# Altium PCB PCB2.PcbDoc
Units mil, origin at the board's own origin, x right, y up, seen from the top; angles counter-clockwise.
Board outline 6000 x 4000 mil, 2 copper layers (Top Layer, Bottom Layer); 48 components, 29 nets, 141 pads, 28 vias.
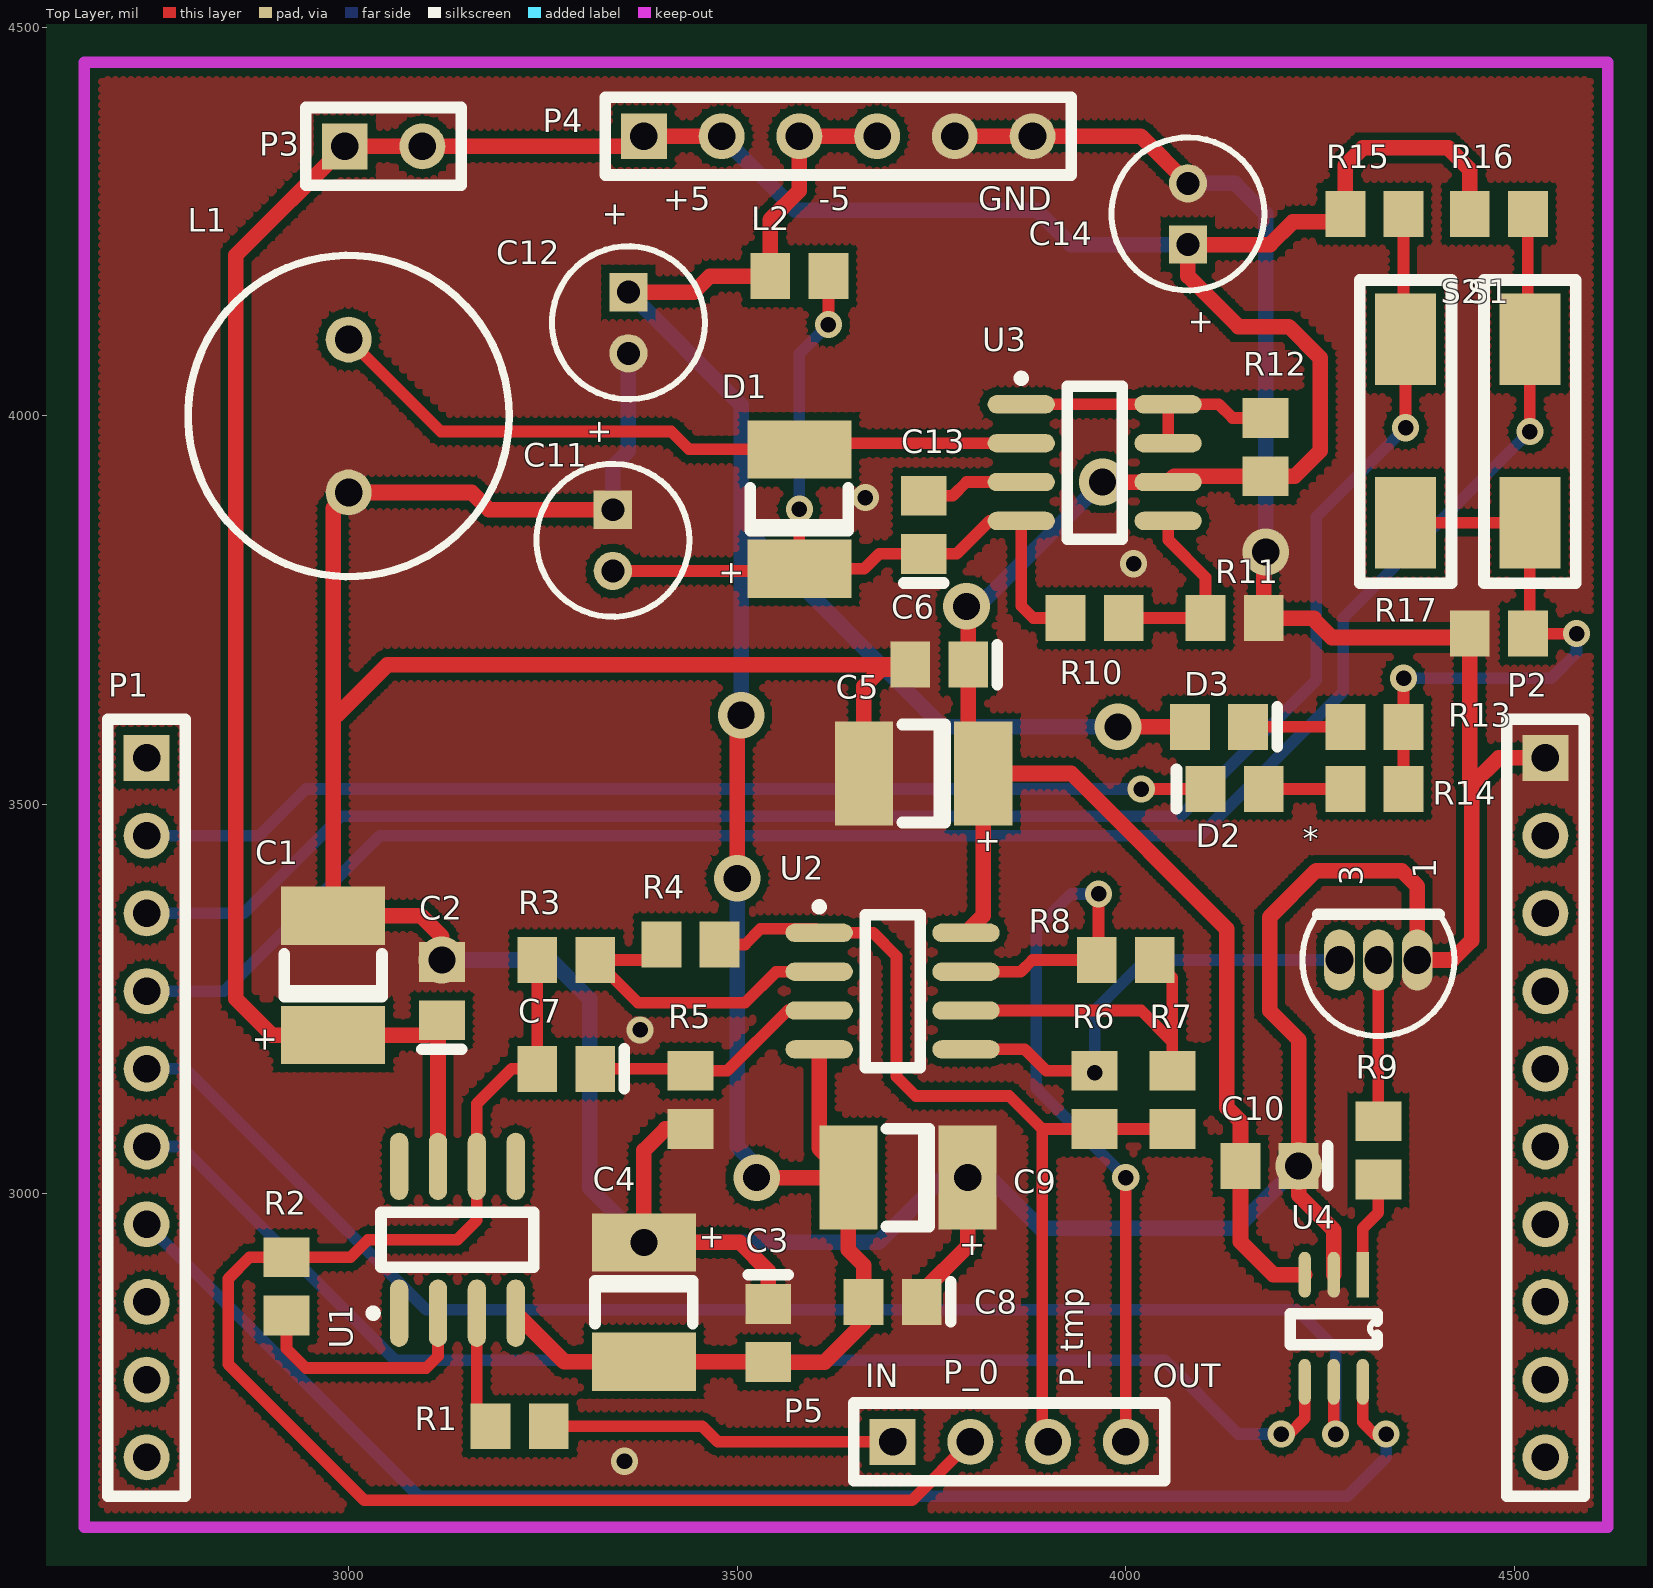
[diagram p0: Top Layer view]
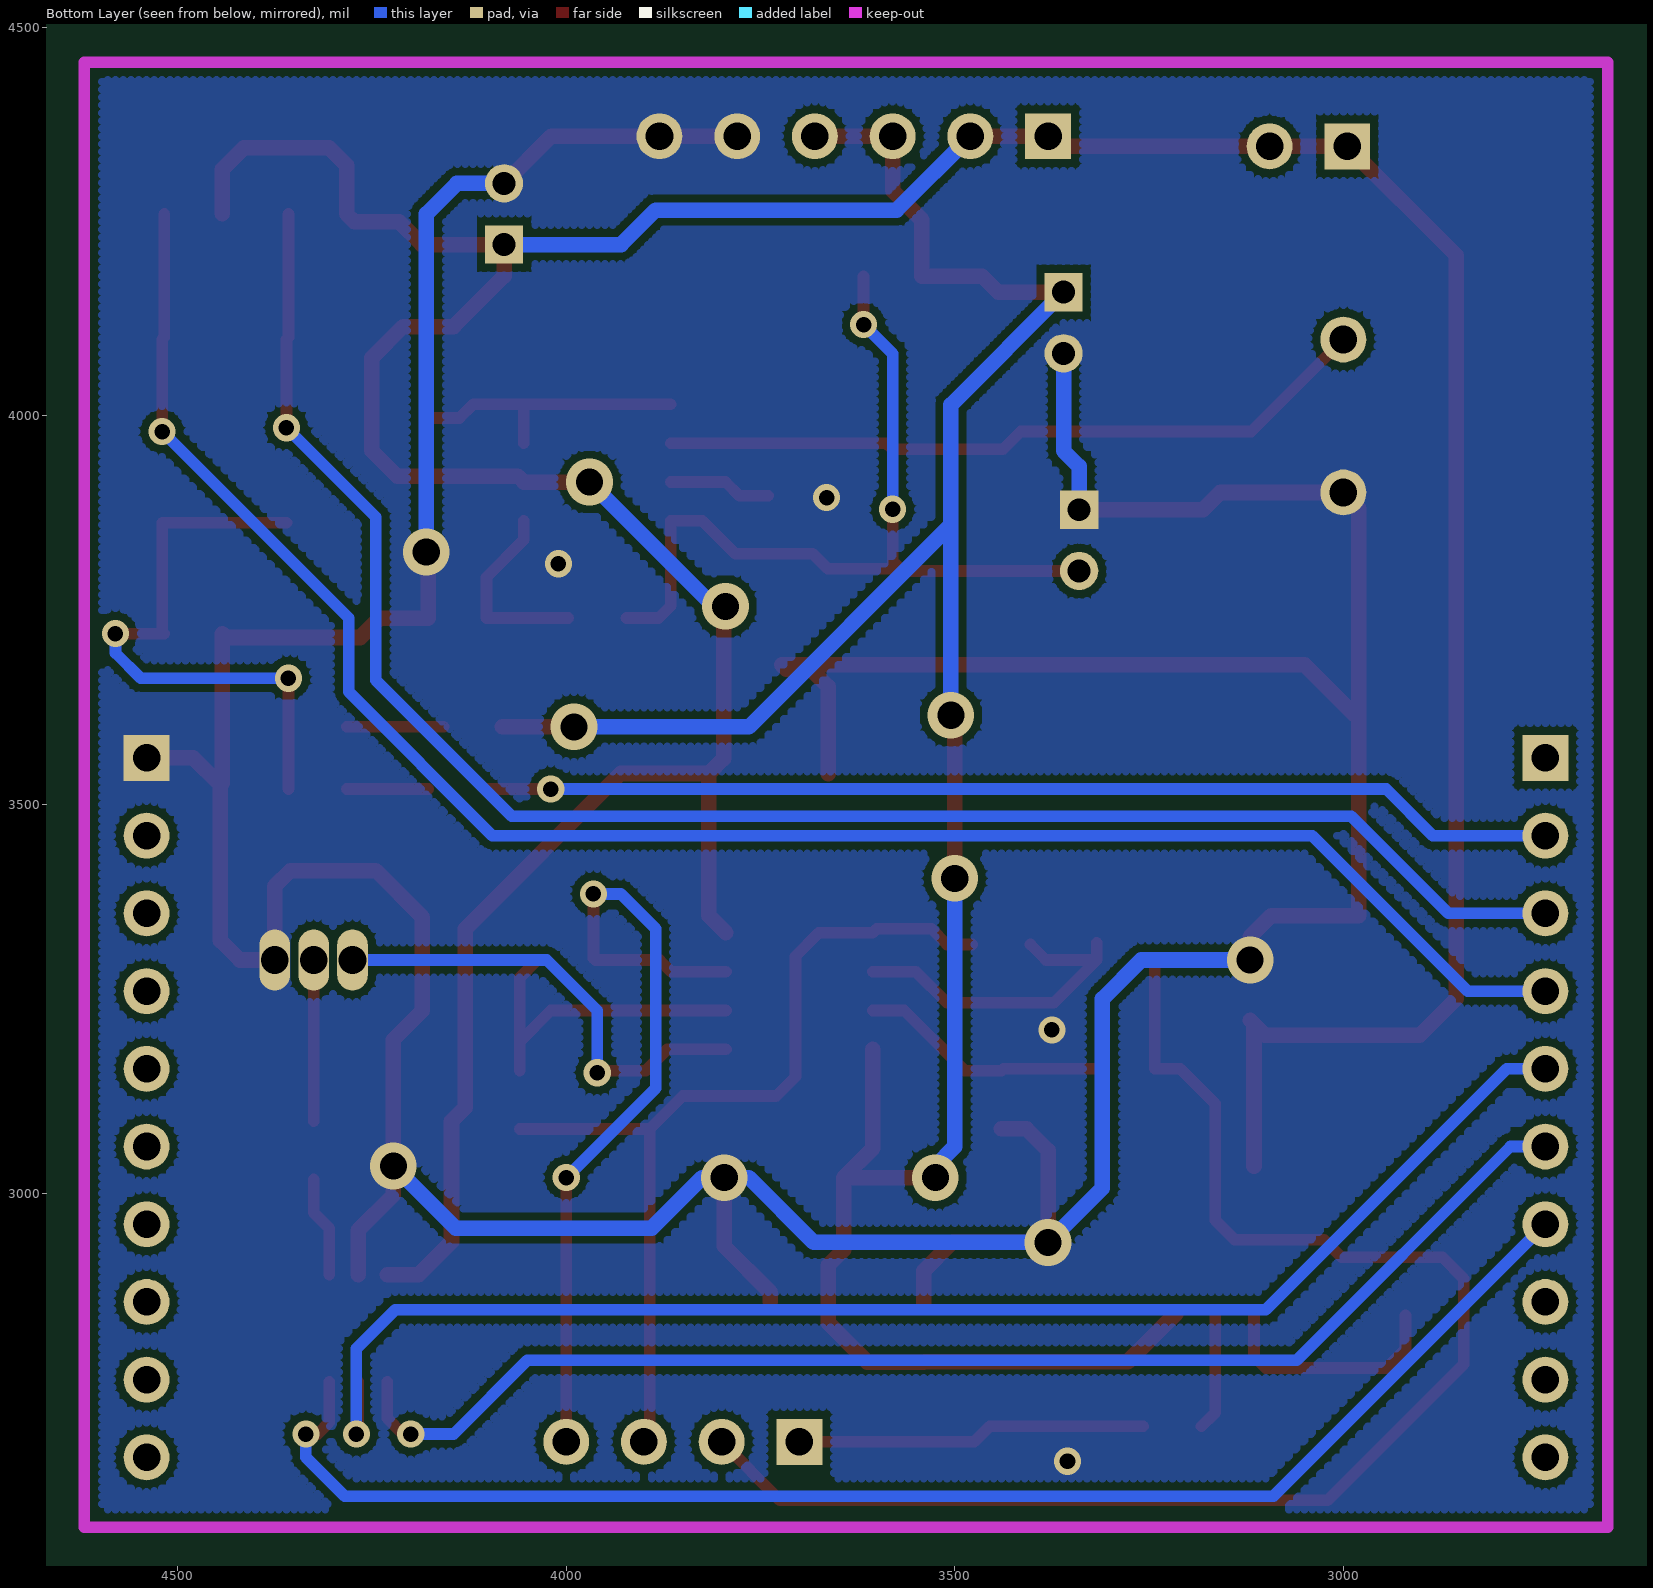
[diagram p1: Bottom Layer view, seen from below]

## Layer stack, top to bottom
Top Layer: signal copper 1.4
Dielectric: dielectric 12.6, FR-4, Dk 4.8
Bottom Layer: signal copper 1.4

## Board outline
1000,1000 7000,1000 7000,5000 1000,5000

## Design rules (kind name [scope] priority, off if disabled: settings)
Clearance [All] p1: gap=10
PolygonConnect [All] p1: connectstyle=Direct reliefconductorwidth=10 reliefentries=4 polygonreliefangle="90 Angle"
RoutingVias [All] p1: holewidth=28 width=50 viastyle="Through Hole" minholewidth=28 minwidth=50 maxholewidth=28 maxwidth=50
SilkscreenOverComponentPads [All] p1: minsilkscreentomaskgap=10
SolderMaskExpansion [All] p1: expansion=4
Width [All] p1: maxlimit=50 minlimit=10 preferedwidth=20
27 further rules are at their usual default settings.

## Components (designator, comment, footprint, x,y, rotation, side; value= is the part's Value field where it differs from the comment)
* "KV1360" T092-3 3800,3300 r90 top
C1 "Cap2" 1812 2980,3280 r90 top
C2 "Cap" C0805 3120,3260 r90 top
C3 "Cap" C0805 3540,2820 r270 top
C4 "Cap2" 1812 3380,2860 r270 top
C5 "Cap2" 1812 3740,3540 r180 top
C6 "Cap" C0805 3760,3680 r180 top
C7 "Cap" C0805 3280,3160 r180 top
C8 "Cap" C0805 3700,2860 r180 top
C9 "Cap2" 1812 3720,3020 r180 top
C10 "Cap" C0805 4185,3035 r180 top
C11 "Cap2" CAPPR2-5x6.8 3340,3840 r270 top
C12 "Cap2" CAPPR2-5x6.8 3360,4120 r270 top
C13 "Cap" C0805 3740,3860 r90 top
C14 "Cap2" CAPPR2-5x6.8 4080,4260 r90 top
D1 "IN5819" 1812 3580,3880 r90 top
D2 "LED0" C0805 4140,3520 r0 top
D3 "LED0" C0805 4120,3600 r180 top
L1 "Inductor" RB5-10.5 3000,4000 r90 top
L2 "Inductor" 2012[0805] 3580,4180 r180 top
P1 "Header 10" HDR1X10 2740,3560 r270 top locked
P2 "Header 10" HDR1X10 4540,3560 r270 top locked
P3 "Header 2" HDR1X2 2995,4347 r0 top locked
P4 "Header 6" HDR1X6 3380,4360 r0 top
P5 "Header 4" HDR1X4 3700,2680 r0 top
R1 "Res2" 2012[0805] 3220,2700 r180 top
R2 "Res2" 2012[0805] 2920,2880 r90 top
R3 "Res2" 2012[0805] 3280,3300 r0 top
R4 "Res2" 2012[0805] 3440,3320 r0 top
R5 "Res2" 2012[0805] 3440,3120 r90 top
R6 "Res2" 2012[0805] 3960,3120 r90 top
R7 "Res2" 2012[0805] 4060,3120 r90 top
R8 "Res2" 2012[0805] 4000,3300 r180 top
R9 "Res2" 2012[0805] 4325,3055 r90 top
R10 "Res2" 2012[0805] 3960,3740 r0 top
R11 "Res2" 2012[0805] 4140,3740 r180 top
R12 "Res2" 2012[0805] 4180,3960 r270 top
R13 "Res2" 2012[0805] 4320,3600 r180 top
R14 "Res2" 2012[0805] 4320,3520 r180 top
R15 "Res2" 2012[0805] 4320,4260 r0 top
R16 "Res2" 2012[0805] 4480,4260 r180 top
R17 "Res2" 2012[0805] 4480,3720 r0 top
S1 "KEY_1" SW 4360,4020 r270 top
S2 "KEY_1" SW 4520,4020 r270 top
U1 "opa890" SO-8_N 3140,2940 r90 top
U2 "opa2134" SO-8_N 3700,3260 r0 top
U3 "MC34063" SO-8_N 3960,3940 r0 top
U4 "dac7512" SOT23-6 4305,2895 r270 top

## Footprints (in the part's own frame and the unit in brackets; to place one, negate y for a bottom-side part, rotate by r counter-clockwise, add the part's x,y. Pads: shape width x height; smd on the part's side, far side on the other; paste and mask are expansions set on the pad)
1812 [mm]
  rect 1.9x3.4 smd: 1(-1.944,0) 2(1.956,0)
  silkscreen extent -0.69,-1.6 0.71,1.6
2012[0805] [mm]
  rect 1.3x1.5 smd: 1(-0.95,0) 2(0.95,0)
C0805 [mm]
  rect 1.3x1.5 smd: 1(-0.95,0) 2(0.95,0)
  silkscreen extent -1.9,-0.65 -1.9,0.65
CAPPR2-5x6.8 [mm] "Capacitor, Electrolytic, Radial; Body 5 x 6.8 mm (Dia.xH typ); Pin Spacing 2 mm (typ)"
  rect 1.25x1.25 hole 0.75: 1(-1,0)
  round 1.25 hole 0.75: 2(1,0)
  silkscreen extent -2.5,-2.5 2.5,2.5
HDR1X2 [mm] "Connector; Header; 2 Position"
  rect 1.5x1.5 hole 0.9: 1(0,0)
  round 1.5 hole 0.9: 2(2.54,0)
  silkscreen extent -1.27,-1.27 3.81,1.27
HDR1X4 [mm] "Connector; Header; 4 Position"
  rect 1.5x1.5 hole 0.9: 1(0,0)
  round 1.5 hole 0.9: 2(2.54,0) 3(5.08,0) 4(7.62,0)
  silkscreen extent -1.27,-1.27 8.89,1.27
HDR1X6 [mm] "Connector; Header; 6 Position"
  rect 1.5x1.5 hole 0.9: 1(0,0)
  round 1.5 hole 0.9: 2(2.54,0) 3(5.08,0) 4(7.62,0) 5(10.16,0) 6(12.7,0)
  silkscreen extent -1.27,-1.27 13.97,1.27
HDR1X10 [mm] "Connector; Header; 10 Position"
  rect 1.5x1.5 hole 0.9: 1(0,0)
  round 1.5 hole 0.9: 2(2.54,0) 3(5.08,0) 4(7.62,0) 5(10.16,0) 6(12.7,0) 7(15.24,0) 8(17.78,0) 9(20.32,0) 10(22.86,0)
  silkscreen extent -1.27,-1.27 24.13,1.27
RB5-10.5 [mm] "Motor, General Kind; 2 Leads"
  round 1.5 hole 0.9: 1(-2.5,0) 2(2.5,0)
  silkscreen extent -5.25,-5.25 5.25,5.25
SO-8_N [mm]
  oval 2.2x0.6 smd: 1(-2.4,1.905) 2(-2.4,0.635) 3(-2.4,-0.635) 4(-2.4,-1.905) 5(2.4,-1.905) 6(2.4,-0.635) 7(2.4,0.635) 8(2.4,1.905)
  silkscreen extent -2.52,-2.5 0.9,2.88
SOT23-6 [mm]
  rect 1.5x0.4 smd: 1(0,0)
  oval 1.5x0.4 smd: 2(0,-0.95) 3(0,-1.9) 4(3.5,-1.9) 5(3.5,-0.95) 6(3.5,0)
  silkscreen extent 1.27,-2.38 2.29,0.48
SW [mm]
  rect 3x2 smd: 1(-2,0) 2(4,0)
  silkscreen extent -3.94,-1.5 5.97,1.5
T092-3 [mm]
  oval 2x1 hole 0.9: 1(0,-14.605) 2(0,-13.335) 3(0,-12.065)
  silkscreen extent -2.48,-15.82 1.5,-10.85

## Part data
C1 C2 C3 C4 C5 C6 C7 C8 C9 C10 C11 C12 C13 C14: "Capacitor"
D1: library part "Diode 11DQ03", "Schottky Rectifier"
D2 D3: "Typical INFRARED GaAs LED"
P1 P2: "Header, 10-Pin"
P3: "Header, 2-Pin"
P4: "Header, 6-Pin"
P5: "Header, 4-Pin"
R1 R2 R3 R4 R5 R6 R7 R8 R9 R10 R11 R12 R13 R14 R15 R16 R17: "Resistor"
S1 S2: library part SW-PB, "Switch"

## Via types
v1: diameter 35, hole 20, Top Layer to Bottom Layer, 17 vias
v2: diameter 60, hole 35, Top Layer to Bottom Layer, 11 vias

## Nets (pads, with @x,y where several pads share a name; then routed paths per layer and width w, separated by ;. In a path a pad name is that pad's centre, name@x,y a point inside that pad or via, vN(x,y) a via of type N, cw(c..) or ccw(c..) an arc to the next point about the centre after c; other vN are vias at no path point)
-5: C3.2 C4.2 C8.2 C9.2 C12.1 D3.2 L2.2 P4.3 P4.4 U1.4 U2.4 | length 3372.2
  Top Layer w20: U1.4 3277.51,2783 C4.2 3539.6,2783 C3.2 3612.6,2782.6 3662.6,2832.6 C8.2 3662.6,2907.4 3643,2927 C9.2 ; C12.1 3444.37,4159.37 3465,4180 L2.2 3542.6,4252.6 3580,4290 P4.3 P4.4 ; v2@3500,3410 3500,3610 v2(3505,3615) ; v2(3525,3020) C9.2 ; U2.4 3605.51,3057.49 C9.2 ; v2(3990,3600) D3.2
  Bottom Layer w20: C12.1 3505,4014.37 3505,3860 ; v2@3500,3410 3500,3060 3525,3035 v2(3525,3020) ; v2(3505,3615) 3505,3860 ; v2(3990,3600) 3765,3600 3505,3860
  other v2: 3500,3405
DA_CLK: P1.5 U4.5 | length 1857.3
  Top Layer w15: U4.5 4267.6,2692.4 v1(4270,2690)
  Bottom Layer w15: P1.5 2790,3160 3100,2850 4220,2850 4270,2800 v1(4270,2690)
DA_DAT: P1.6 U4.4 | length 1698.8
  Top Layer w15: v1(4200,2690) 4210,2690 4230.2,2710.2 U4.4
  Bottom Layer w15: P1.6 2785,3060 3060,2785 4050,2785 4145,2690 v1(4200,2690)
DA_SYNC: P1.7 U4.6 | length 1879.1
  Top Layer w15: U4.6 4305,2705 4320,2690 v1(4335,2690)
  Bottom Layer w15: P1.7 3090,2610 4285,2610 4335,2660 v1(4335,2690)
FINAL_OUT: P5.4 R8.2 U2.7 | length 1073.7
  Top Layer w15: U2.7 3865,3285 3880,3300 R8.2 3965,3302.4 v1(3965,3385) ; v1@3995,3015 v1(4000,3020) P5.4
  Bottom Layer w15: v1(3965,3385) 3930,3385 3885,3340 3885,3135 v1(4000,3020)
GND: *.1 C1.2 C2.2 C3.1 C4.1 C5.2 C6.2 C8.1 C9.1 C10.1 C11.1 C12.2 C14.2 L1.1 P2.1 P4.5 P4.6 R5.1 R11.1 R17.1 U4.2 | length 6968.1
  Top Layer w20: 2985,3615 3050,3680 C6.2 3716.6,3674 3685,3674 3663,3652 C5.2 ; C2.2 3120,3330 3093,3357 C1.2 2980,3881.57 L1.1 3158.43,3901.57 3180.63,3879.37 C11.1 ; R5.1 3407.6,3082.6 3380,3055 v2(3380,2936.54) 3503.46,2936.54 3540,2900 C3.1 ; C8.1 3737.4,2872.4 3796.54,2931.54 v2(3796.54,3020) ; P4.5 P4.6 4019.37,4360 C14.2 ; v2@4177.4,3817.4 R11.1 4240,3740 ; C10.1@4215,3042.4 v2(4222.4,3035) ; 4242.6,3740 4240,3740 ; U4.2 4267.6,2952.4 4222.4,2997.6 v2(4222.4,3035) ; P2.1 4480,3560 4445,3525 ; v2(4222.4,3035) 4222.4,3197.6 4185,3235 4185,3355 4245,3415 4355,3415 4375,3395 *.1 4420,3300 4445,3325 4445,3525 ; 4240,3740 4265,3715 4437.6,3715 R17.1 4442.6,3527.4 4445,3525
  Bottom Layer w20: v2(3120,3300) 3260,3300 3310,3250 3310,3006.54 v2(3380,2936.54) 3681.54,2936.54 3765,3020 v2(3796.54,3020) 3825,3020 3890,2955 4142.4,2955 v2(4222.4,3035) ; C11.1 3340,3935 3360,3955 C12.2 ; C14.2 4140.63,4299.37 4180,4260 v2(4180,3825)
  other v1: 3355,2655 3375,3210 4010,3810 3665,3895
KEY1: P1.3 R15.2 S1.1 | length 2278
  Top Layer w15: R15.2 4357.4,4101.34 S1.1 v1(4360,3985)
  Bottom Layer w15: P1.3 2865,3360 2990,3485 4070,3485 4245,3660 4245,3870 v1(4360,3985)
KEY2: P1.4 R16.1 S2.1 | length 2415
  Top Layer w15: R16.1 4517.4,4101.34 S2.1 v1(4520,3980)
  Bottom Layer w15: P1.4 2840,3260 3040,3460 4095,3460 4280,3645 4280,3740 v1(4520,3980)
LED: D2.1 P1.2 | length 1387.5
  Top Layer w15: v1(4020,3520) D2.1
  Bottom Layer w15: P1.2 2885,3460 2945,3520 v1(4020,3520)
Net*_2: *.2 R9.2 | length 207.6
  Top Layer w15: R9.2 *.2
Net*_3: *.3 R6.2 U2.5 | length 598.9
  Top Layer w15: U2.5 3870,3185 3897.6,3157.4 R6.2
  Bottom Layer w15: v1(3960,3155) 3960,3235 4025,3300 *.3
NetC7_1: C7.1 R5.2 U2.3 | length 321.3
  Top Layer w15: C7.1 3437.4,3160 R5.2 3487.4,3157.4 3565,3235 U2.3
NetC11_2: C11.2 C13.1 D1.1 L2.1 R10.1 U3.4 | length 1124.3
  Top Layer w15: C11.2 3577.17,3800.63 D1.1 ; D1.1@3575,3808.46 D1.1 ; v1(3580,3880) D1.1 ; v1(3617.4,4117.6) L2.1 ; R10.1 3881.02,3740 3865.51,3755.51 U3.4 3825,3865 3782.6,3822.6 C13.1 3682.6,3822.6 3663.46,3803.46 D1.1
  Bottom Layer w15: v1(3580,3880) 3580,4080.2 v1(3617.4,4117.6)
NetC13_2: C13.2 U3.3 | length 132.8
  Top Layer w15: C13.2 3777.4,3897.4 3795,3915 U3.3
NetD1_2: D1.2 L1.2 U3.2 | length 927.4
  Top Layer w15: L1.2 3118.43,3980 3415,3980 3438,3957 D1.2 3588,3965 U3.2
NetD2_2: D2.2 R14.2 | length 105.2
  Top Layer w15: D2.2 R14.2
NetD3_1: D3.1 R13.2 | length 125.2
  Top Layer w15: D3.1 R13.2
NetR1_2: R1.2 U1.3 | length 152.8
  Top Layer w15: U1.3 3165,2717.6 R1.2
NetR2_1: R2.1 U1.2 | length 309.7
  Top Layer w15: R2.1 2920,2800 2945,2775 3100,2775 3115,2790 U1.2
NetR3_2: R3.2 R4.1 U2.2 | length 443.3
  Top Layer w15: R3.2@3317.4,3322.4 R3.2 ; R4.1 3382.6,3300 R3.2 ; U2.2 3550,3285 3510,3245 3372.4,3245 R3.2
NetR7_2: R7.2 R8.1 U2.6 | length 434
  Top Layer w15: U2.6 4020,3235 4060,3195 ; R8.1 4060,3277.4 4060,3195 ; R7.2 4060,3195
NetR9_1: R9.1 U4.1 | length 130.9
  Top Layer w15: U4.1 4305,2955 4325,2975 R9.1
NetR10_2: R10.2 R11.2 U3.5 | length 250.1
  Top Layer w15: R10.2 R11.2 4102.6,3792.4 4054.49,3840.51 U3.5
NetR12_1: R12.1 U3.1 U3.7 U3.8 | length 371.8
  Top Layer w15: U3.1 U3.8 ; U3.7 U3.8 ; R12.1 4137.4,3997.4 4119.8,4015 U3.8
NetR13_1: R13.1 R14.1 R17.2 S1.2 S2.2 | length 769.8
  Top Layer w15: R14.1 R13.1 v1(4357.4,3662.6) ; S1.2 S2.2 4520,3722.6 R17.2 v1(4580,3720)
  Bottom Layer w15: v1(4357.4,3662.6) 4547.6,3662.6 4580,3695 v1(4580,3720)
OP2+: C1.1 C2.1 C5.1 C6.1 C10.2 C14.1 P3.1 P3.2 P4.1 P4.2 R12.2 R15.1 R16.2 U1.7 U2.8 U3.6 U4.3 | length 5547.9
  Top Layer w20: U1.7 C2.1@3115,3217.6 ; C2.1 C2.1@3115,3217.6 ; P4.2 P4.1 3367,4347 P3.2 P3.1 2855,4207 2855,3250 2901.54,3203.46 C1.1 3100.86,3203.46 C2.1@3115,3217.6 ; U2.8 3816.54,3357.06 C5.1 ; v2@3797.4,3742.4 C6.1 3797.4,3559.14 C5.1 ; v2@3965,3920 v2(3970,3915) U3.6 4062.09,3922.6 R12.2 4217.6,3922.6 4250,3955 4250,4075 4210,4115 4145,4115 4080,4180 C14.1 4185.63,4220.63 4215,4250 4272.6,4250 R15.1 4282.6,4322.6 4305,4345 4415,4345 4442.6,4317.4 R16.2 ; U4.3 4190,2895 4147.6,2937.4 C10.2 4147.6,3092.6 4130,3110.2 4130,3340 3930,3540 C5.1
  Bottom Layer w20: P4.2 3575,4265 3885,4265 3929.37,4220.63 C14.1 ; v2(3795,3755) 3810,3755 v2(3970,3915)
PHASE_0: C7.2 P5.2 R2.2 R3.1 U1.6 | length 1905.9
  Top Layer w15: R3.1 C7.2 3210,3160 3165,3115 U1.6 3165,2965 3140,2940 3025,2940 3002.4,2917.4 R2.2 2872.4,2917.4 2845,2890 2845,2780 3020,2605 3725,2605 P5.2
PHASE_TMP: P5.3 R4.2 R6.1 R7.1 U2.1 | length 1194
  Top Layer w15: R4.2 3510,3320 3530,3340 3600.51,3340 U2.1 3675,3335 3705,3305 3705,3150 3730,3125 3850,3125 3892.4,3082.6 ; P5.3 3892.4,2687.6 3892.4,3082.6 ; R7.1 R6.1 3892.4,3082.6
SIN_IN: P5.1 R1.1 | length 458
  Top Layer w15: R1.1 3455,2700 3475,2680 P5.1 P5.1@3695,2675
pads on no net: P1.1 P1.8 P1.9 P1.10 P2.2 P2.3 P2.4 P2.5 P2.6 P2.7 P2.8 P2.9 P2.10 U1.1 U1.5 U1.8

## Polygon pours and split planes (outlines as drawn)
GND on Top Layer "Keep-Out Layer-No Net" (hatched 90Degree grid 10 track 10, remove dead copper): 2670,4455 4610,4455 4610,2575 4605,2570 4590,2585 2660,2585 2660,4455
GND on Bottom Layer "Keep-Out Layer-No Net" (hatched 90Degree grid 10 track 10, remove dead copper): 2660,4455 4620,4455 4620,2575 4615,2570 4610,2575 2660,2575 2660,4455

## Keep-outs
Keep-Out Layer:
  lines w15: 2660,2570 2660,4455 4620,4455 4620,2570 2660,2570

## Silkscreen, mask and mechanical layers (free items; w line width, h text height)
Top Overlay:
  text "+5" at 3405,4265 h30
  text "-5" at 3605,4265 h30
  text "GND" at 3810,4265 h30
  text "P_0" at 3765,2755 h30
  text "IN" at 3665,2750 h30
  text "P_tmp" at 3945,2750 h30 r90
  text "OUT" at 4035,2750 h30

## Text inside footprints (layer, text, board x,y; h text height)
*: Top Overlay "3" at 4304.92,3395.67 h30 r90; Top Overlay "1" at 4399.8,3404.72 h30 r90
C1: Top Overlay "+" at 2905,3180 h30 r90
C4: Top Overlay "+" at 3455,2960 h30 r270
C5: Top Overlay "+" at 3840,3465 h30 r180
C9: Top Overlay "+" at 3820,2945 h30 r180
C11: Top Overlay "+" at 3310.47,3996.5 h30 r270
C12: Top Overlay "+" at 3330.47,4276.5 h30 r270
C14: Top Overlay "+" at 4109.53,4103.5 h30 r90
D1: Top Overlay "+" at 3505,3780 h30 r90